# Altium PCB MPU.PcbDoc
Units mil, origin at the board's own origin, x right, y up, seen from the top; angles counter-clockwise.
Board outline 669 x 700 mil, 4 copper layers (Component Side, Ground Plane, Power Plane, Solder Side), stack 60.8 mil thick; 10 components, 9 nets, 50 pads, 0 vias.
Unrouted connection lines stored in the file: 208.
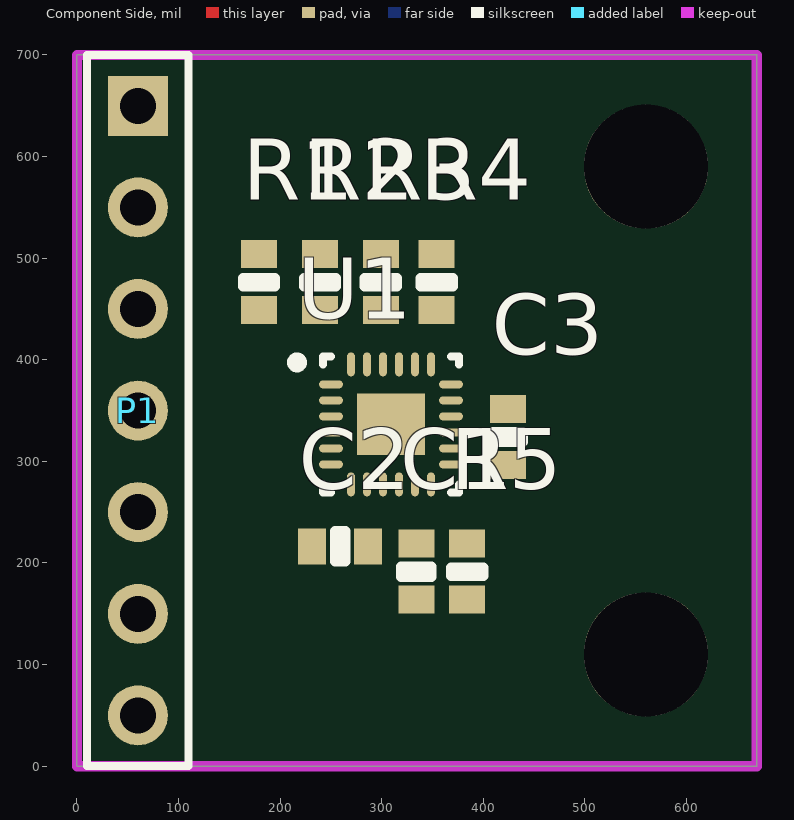
[diagram p0: Component Side view]
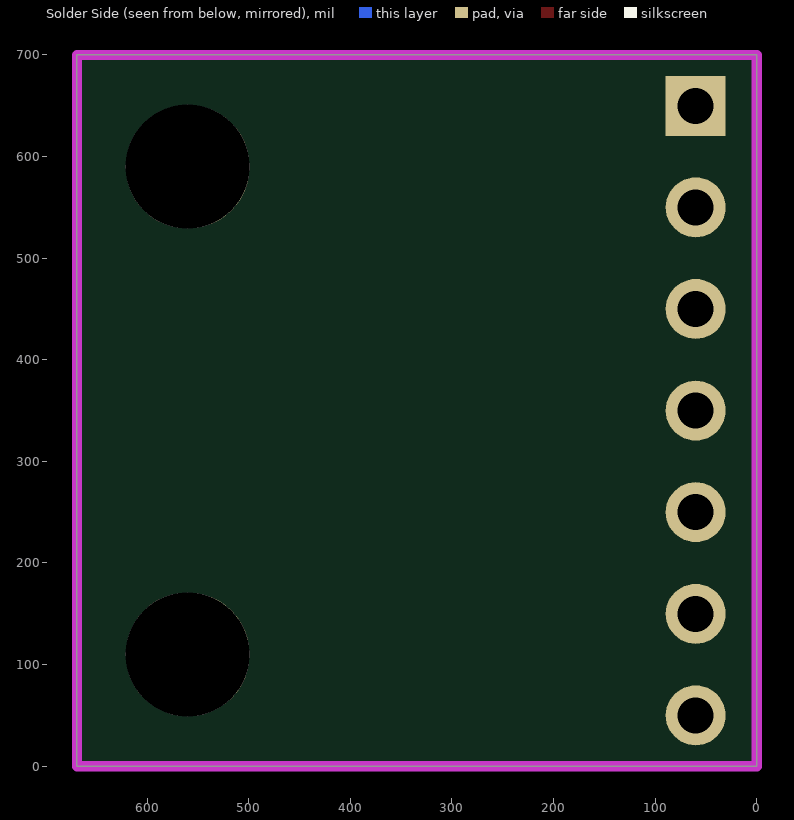
[diagram p1: Solder Side view, seen from below]
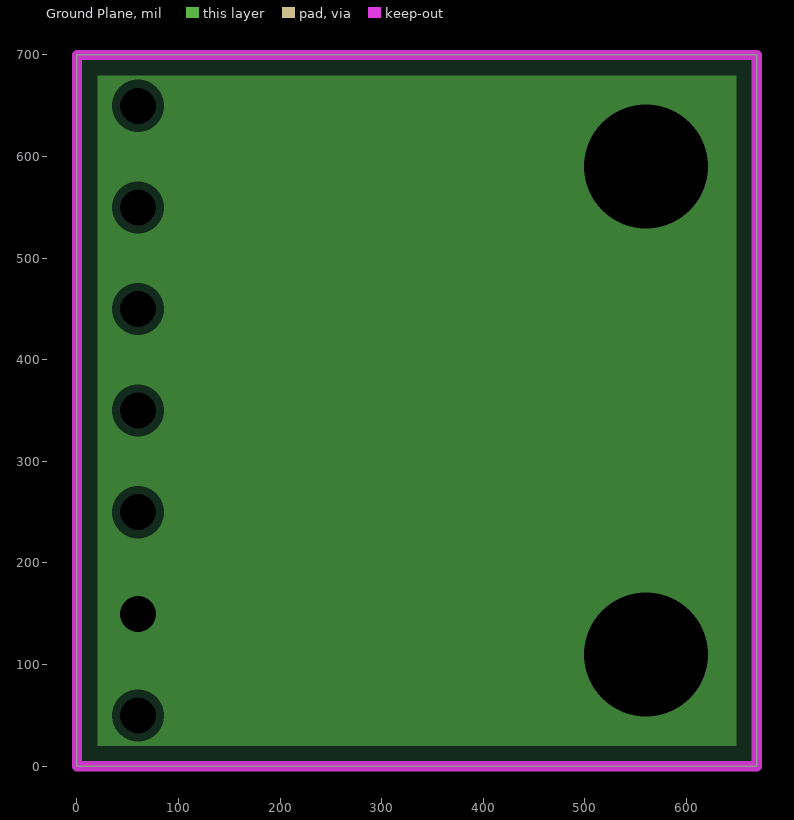
[diagram p2: Ground Plane, clearances drawn from the general rule]
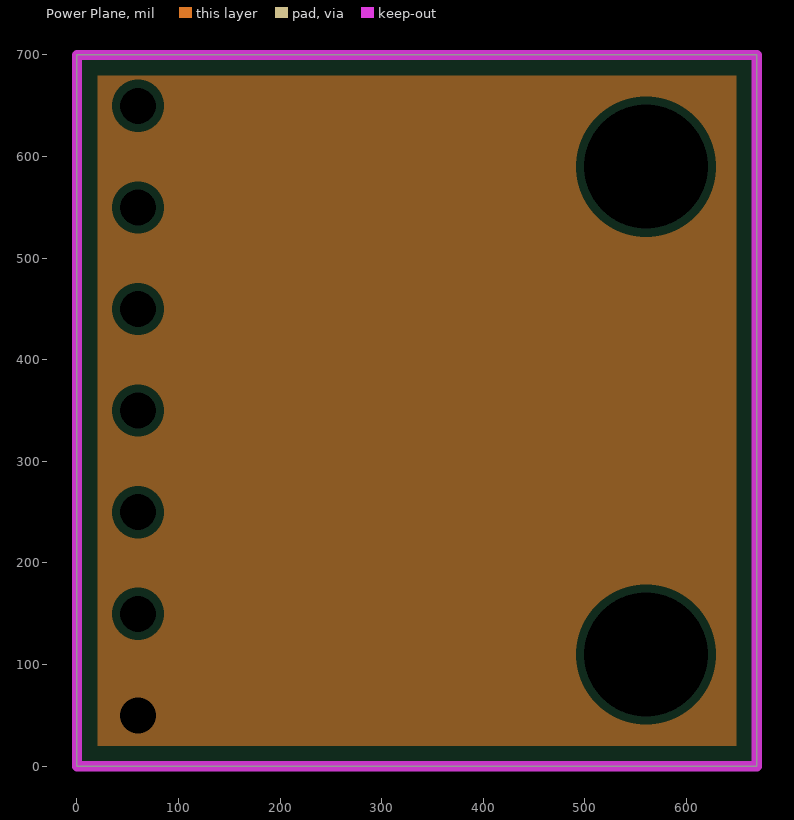
[diagram p3: Power Plane, clearances drawn from the general rule]

## Layer stack, top to bottom
Top Solder: solder mask 0.4, Solder Resist, Dk 3.5
Component Side: signal copper 1.4
Dielectric 1: prepreg 9.1, 2116, Dk 4.2
Ground Plane: plane copper 1.4, net GND
Dielectric 3: core 37, FR-4, Dk 4.2
Power Plane: plane copper 1.4, net VCC
Dielectric 4: prepreg 9.1, 2116, Dk 4.2
Solder Side: signal copper 1.4
Bottom Solder: solder mask 0.4, Solder Resist, Dk 3.5

## Board outline
0,0 669,0 669,700 0,700

## Design rules (kind name [scope] priority, off if disabled: settings)
Clearance [All] p1: gap=6 ignorepadtopadclearanceinfootprint=FALSE
ComponentClearance [Not IsNetTieComponent vs Not IsNetTieComponent] p1: gap=10 collisioncheckmode=3 verticalgap=10 showdistances=FALSE
HoleSize [All] p1: absolutevalues=TRUE maxlimit=500 minlimit=1 maxpercent=80.000 minpercent=20.000
MinimumSolderMaskSliver [All] p1: minsoldermaskwidth=3
PlaneClearance [All] p1: clearance=8
PlaneConnect [All] p1: planeconnectstyle=Direct reliefexpansion=20 reliefentries=4 reliefconductorwidth=10 reliefairgap=10
PolygonConnect PolygonConnectLED [HasFootprint('XZMDKCBDDG45S-9')] p1: connectstyle=Direct reliefconductorwidth=10 reliefentries=4 polygonreliefangle="90 Angle" airgapwidth=10
PolygonConnect PolygonConnectPower [IsNamedPolygon('Power')] p2: connectstyle=Direct reliefconductorwidth=10 reliefentries=4 polygonreliefangle="90 Angle" airgapwidth=10
PolygonConnect PolygonConnectVDD [All vs InNet('VDD')] p3: connectstyle=Direct reliefconductorwidth=10 reliefentries=4 polygonreliefangle="90 Angle" airgapwidth=10
PolygonConnect PolygonConnectVia [All vs IsVia] p4: connectstyle=Direct reliefconductorwidth=10 reliefentries=4 polygonreliefangle="90 Angle" airgapwidth=10
PolygonConnect [All] p5: connectstyle=Relief reliefconductorwidth=20 reliefentries=4 polygonreliefangle="90 Angle" airgapwidth=10
RoomDefinition U_MPU9250 [InComponentClass('U_MPU9250')] p1: confinementstyle=ConfineIn formatcopy=TRUE lockcomponents=FALSE outline 79.06,121.38 464.06,121.38 464.06,686.38 79.06,686.38
RoomDefinition ACC [InComponentClass('ACC')] p2: confinementstyle=ConfineIn formatcopy=TRUE lockcomponents=FALSE outline 953.94,21.06 226.06,21.06 226.06,148.94 953.94,148.94
RoutingVias [All] p1: holewidth=10 width=20 viastyle="Through Hole" minholewidth=10 minwidth=20 maxholewidth=28 maxwidth=50
SilkToSilkClearance [All] p1: silktosilkclearance=0
SolderMaskExpansion SolderMaskExpansionVia [IsVia] p1: expansion=1 soldermaskfromhole=TRUE
SolderMaskExpansion [All] p2: expansion=3
Width [All] p1: maxlimit=500 minlimit=10 preferedwidth=10 minimp=50.000000 maximp=50.000000 favimp=50.000000
24 further rules are at their usual default settings.

## Classes and differential pairs
component class U_MPU9250: C1 C2 C3 R1 R2 R3 R4 R5 U1
component class ACC: P1

## Components (designator, comment, footprint, x,y, rotation, side; value= is the part's Value field where it differs from the comment)
C1 "0.1uF 6.3V 0603" C0603[1608X92] 334.06,191.38 r90 top value=0.1uF
C2 "10nF 6.3V 0603" C0603[1608X92] 259.06,216.38 r180 top value=10nF
C3 "0.1uF 6.3V 0603" C0603[1608X92] 424.06,323.94 r90 top value=0.1uF
P1 "Header 7" HDR1X7 60,650 r270 top
R1 "10K 1% 0603" R0603[1608] 179.06,476.38 r270 top value=10K
R2 "10K 1% 0603" R0603[1608] 239.06,476.38 r270 top value=10K
R3 "10K 1% 0603" R0603[1608] 299.06,476.38 r270 top value=10K
R4 "10K 1% 0603" R0603[1608] 354.06,476.38 r90 top value=10K
R5 "10K 1% 0603" R0603[1608] 384.06,191.38 r270 top value=10K
U1 "MPU-9250" "QFN-24 (6mil)" 309.06,336.38 r0 top

## Footprints (in the part's own frame and the unit in brackets; to place one, negate y for a bottom-side part, rotate by r counter-clockwise, add the part's x,y. Pads: shape width x height; smd on the part's side, far side on the other; paste and mask are expansions set on the pad)
C0603[1608X92] [mm] "Chip Capacitor, Body 1.6x0.8mm"
  rect 0.7x0.9 smd: 1(-0.7,0) 2(0.7,0)
  silkscreen extent -0.13,-0.38 0.13,0.38, body extent -0.8,-0.4 0.8,0.4, height 0.93
HDR1X7 [mm] "Connector; Header; 7 Position"
  rect 1.5x1.5 hole 0.9: 1(0,0)
  round 1.5 hole 0.9: 2(2.54,0) 3(5.08,0) 4(7.62,0) 5(10.16,0) 6(12.7,0) 7(15.24,0)
  silkscreen extent -1.27,-1.27 16.51,1.27
"QFN-24 (6mil)" [mm] "6mil, Thermal Pad 1.54x1.70mm, IPC High Density"
  oval 0.6x0.2 smd: 1(-1.5,1) 2(-1.5,0.6) 3(-1.5,0.2) 4(-1.5,-0.2) 5(-1.5,-0.6) 6(-1.5,-1) 13(1.5,-1) 14(1.5,-0.6) 15(1.5,-0.2) 16(1.5,0.2) 17(1.5,0.6) 18(1.5,1)
  oval 0.2x0.6 smd: 7(-1,-1.5) 8(-0.6,-1.5) 9(-0.2,-1.5) 10(0.2,-1.5) 11(0.6,-1.5) 12(1,-1.5) 19(1,1.5) 20(0.6,1.5) 21(0.2,1.5) 22(-0.2,1.5) 23(-0.6,1.5) 24(-1,1.5)
  rect 1.7x1.54 smd: 25(0,0)
  silkscreen extent -2.47,-1.7 1.7,1.7, body extent -1.55,-1.55 1.55,1.55, height 1.05
R0603[1608] [mm] "Chip Resistor, Body 1.55x0.85mm"
  rect 0.7x0.9 smd: 1(-0.7,0) 2(0.7,0)
  silkscreen extent -0.1,-0.4 0.1,0.4, body extent -0.77,-0.42 0.78,0.43, height 0.45

## Part data
C1 C3: library part CAP_0.1uF_6.3V_0603_10%, "0.1uF 6.3V 10% 0603 (1608 Metric)", Manufacturer=Murata, Tolerance=10%, Voltage=6.3V, Mounting Technology="Surface Mount", PackageDescription="0603 (1608 Metric)", PackageReference=0603
C2: library part CAP_10nF_6.3V_0603_10%, "10nF 6.3V 10% 0603 (1608 Metric)", Manufacturer=Murata, Tolerance=10%, Voltage=6.3V, Mounting Technology="Surface Mount", PackageDescription="0603 (1608 Metric)", PackageReference=0603
P1: "Header, 7-Pin", LatestRevisionDate=17-Jul-2002, LatestRevisionNote="Re-released for DXP Platform.", Publisher="Altium Limited"
R1 R2 R3 R4 R5: library part RES_10K_0603_1%, "10K 0.25W 1% 0603 (1005 Metric)", Manufacturer=Vishay, PartNumber=RCS060310K0FKEA, Power=0.25W, Tolerance=1%, ComponentLink1Description=Datasheet, ComponentLink1URL=http://www.vishay.com/docs/20065/rcse3.pdf, Mounting Technology="Surface Mount", PackageDescription="0603 (1608 Metric)", PackageReference=0603
U1: Manufacturer=Invensense, Mounting Technology="Surface Mount", PackageReference=QFN-24, PartNumber=MPU-9250

## Free pads (board coordinates)
  round 122.05 hole 122.05 mask+0: 0(560,110) 0(560,590)

## Nets (pads, with @x,y where several pads share a name; then routed paths per layer and width w, separated by ;. In a path a pad name is that pad's centre, name@x,y a point inside that pad or via, vN(x,y) a via of type N, cw(c..) or ccw(c..) an arc to the next point about the centre after c; other vN are vias at no path point)
GND: C1.1 C2.2 C3.2 P1.6 pad.0 R4.2 R5.2 U1.18 U1.20
I2C.SCL: P1.5 R3.2 U1.23
I2C.SDA: P1.4 R2.2 U1.24
NetC1_2: C1.2 U1.10
NetP1_1: P1.1 U1.12
NetR5_1: R5.1 U1.11
SPI.CS: P1.2 R1.2 U1.22
SPI.MISO: P1.3 R4.1 U1.9
VCC: C2.1 C3.1 P1.7 R1.1 R2.1 R3.1 U1.1 U1.8 U1.13
pads on no net: U1.2 U1.3 U1.4 U1.5 U1.6 U1.7 U1.14 U1.15 U1.16 U1.17 U1.19 U1.21 U1.25

## Polygon pours and split planes (outlines as drawn)
GND on Ground Plane (split plane): 648.9,20.1 20.1,20.1 20.1,679.9 648.9,679.9
VCC on Power Plane (split plane): 648.9,20.1 20.1,20.1 20.1,679.9 648.9,679.9

## Keep-outs
Keep-Out Layer:
  the board outline again, w10

## Text inside footprints (layer, text, board x,y; h text height)
U1: Mechanical 13 "Y" at 304.13,363.94 h15.75; Mechanical 13 "x" at 335.63,330.47 h15.75; Mechanical 13 "Z" at 282.48,306.85 h15.75